# Altium PCB Tonegenerator.PcbDoc
Units mm, origin at the board's own origin, x right, y up, seen from the top; angles counter-clockwise.
Board outline 50 x 50 mm, 2 copper layers (Top Layer, Bottom Layer); 30 components, 21 nets, 124 pads, 36 vias.
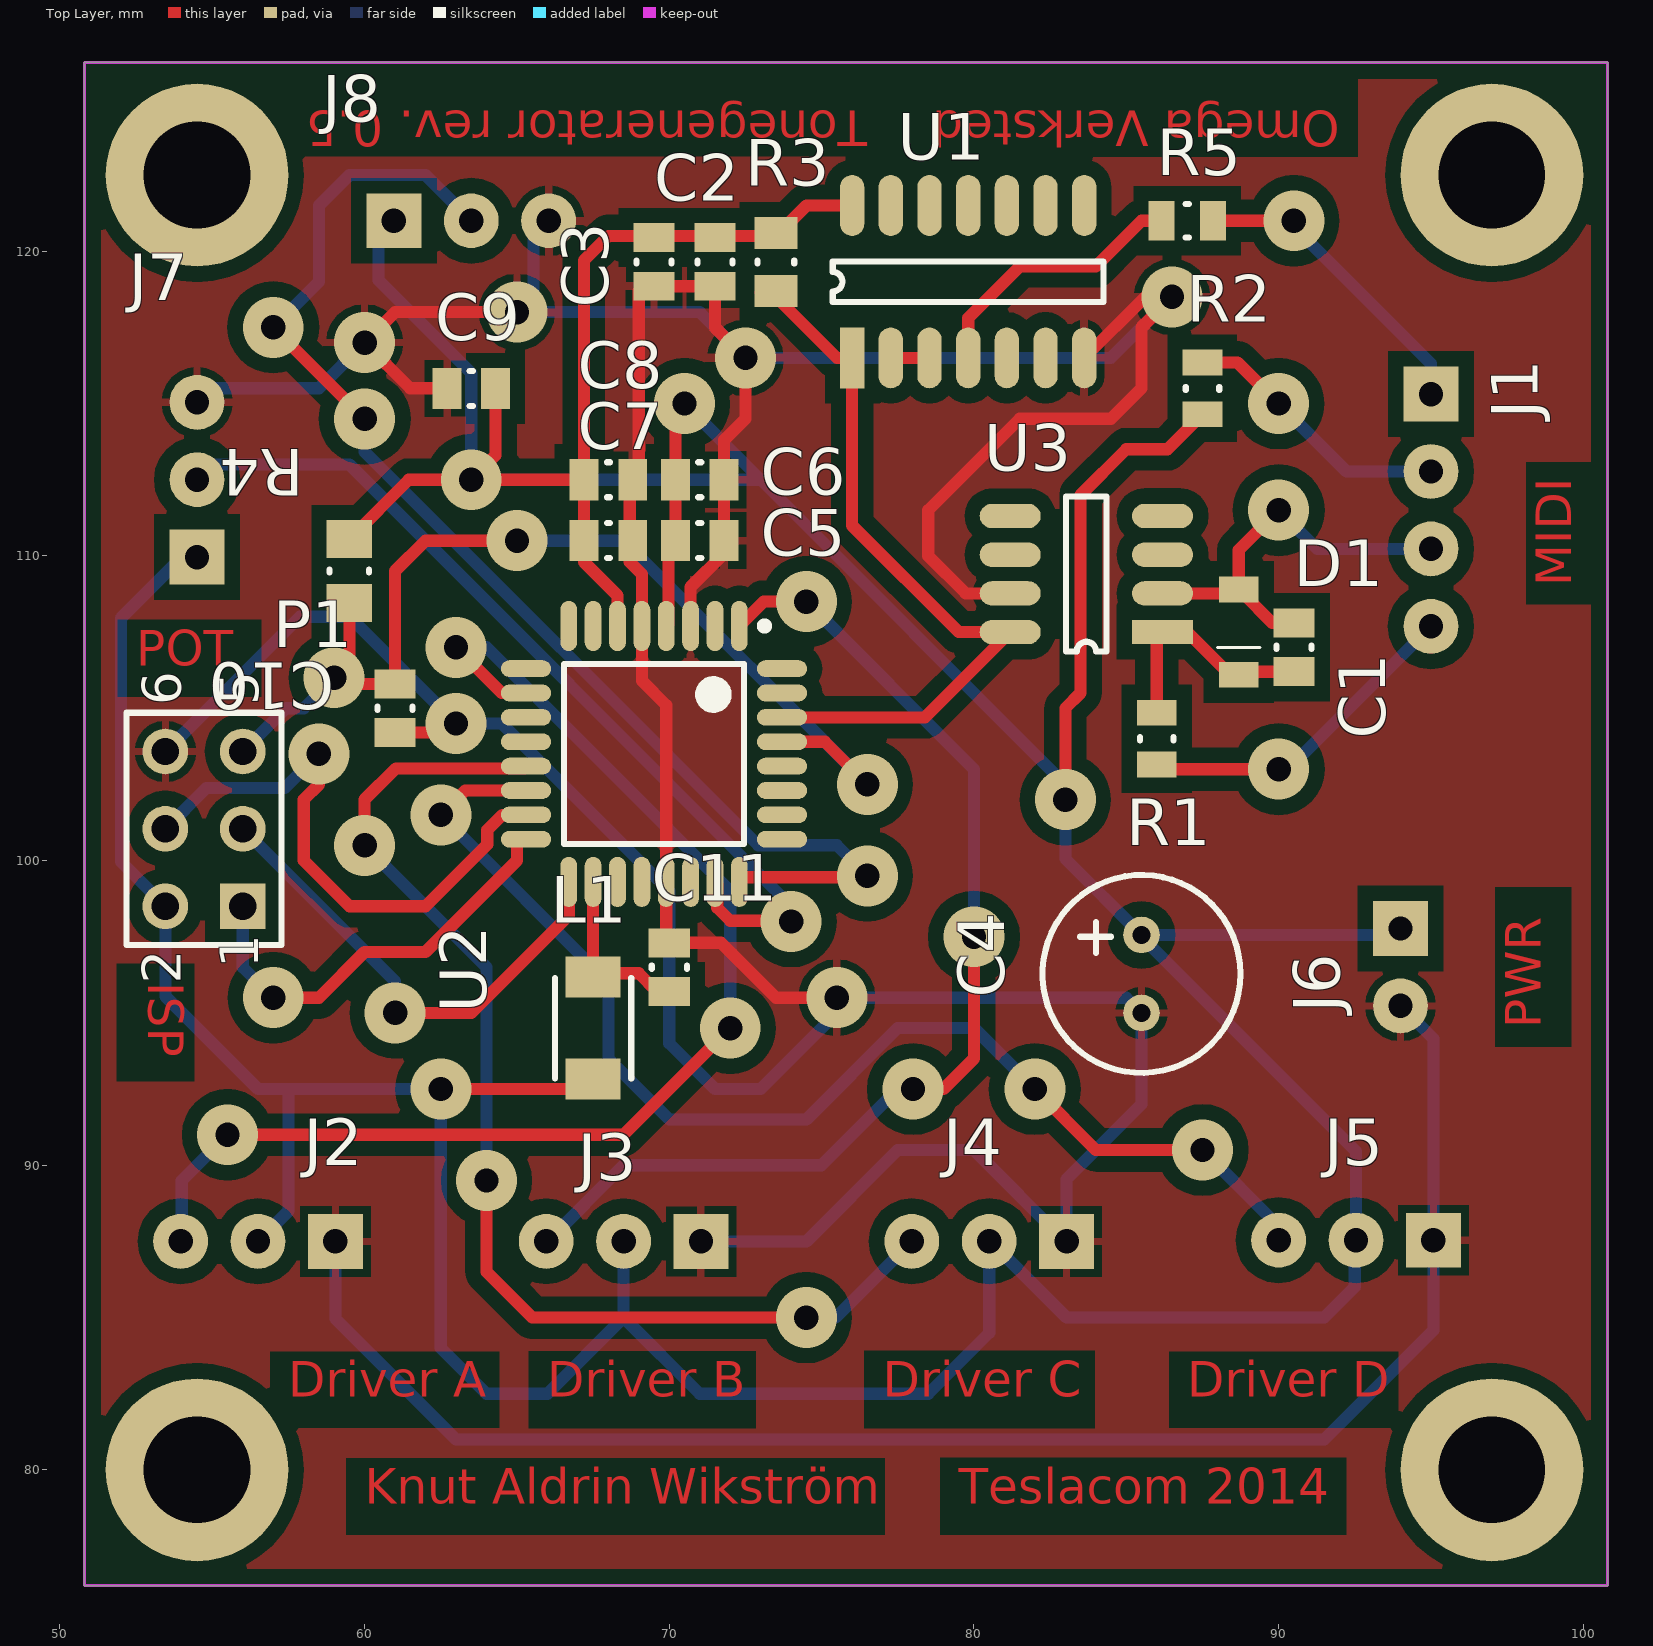
[diagram p0: Top Layer view]
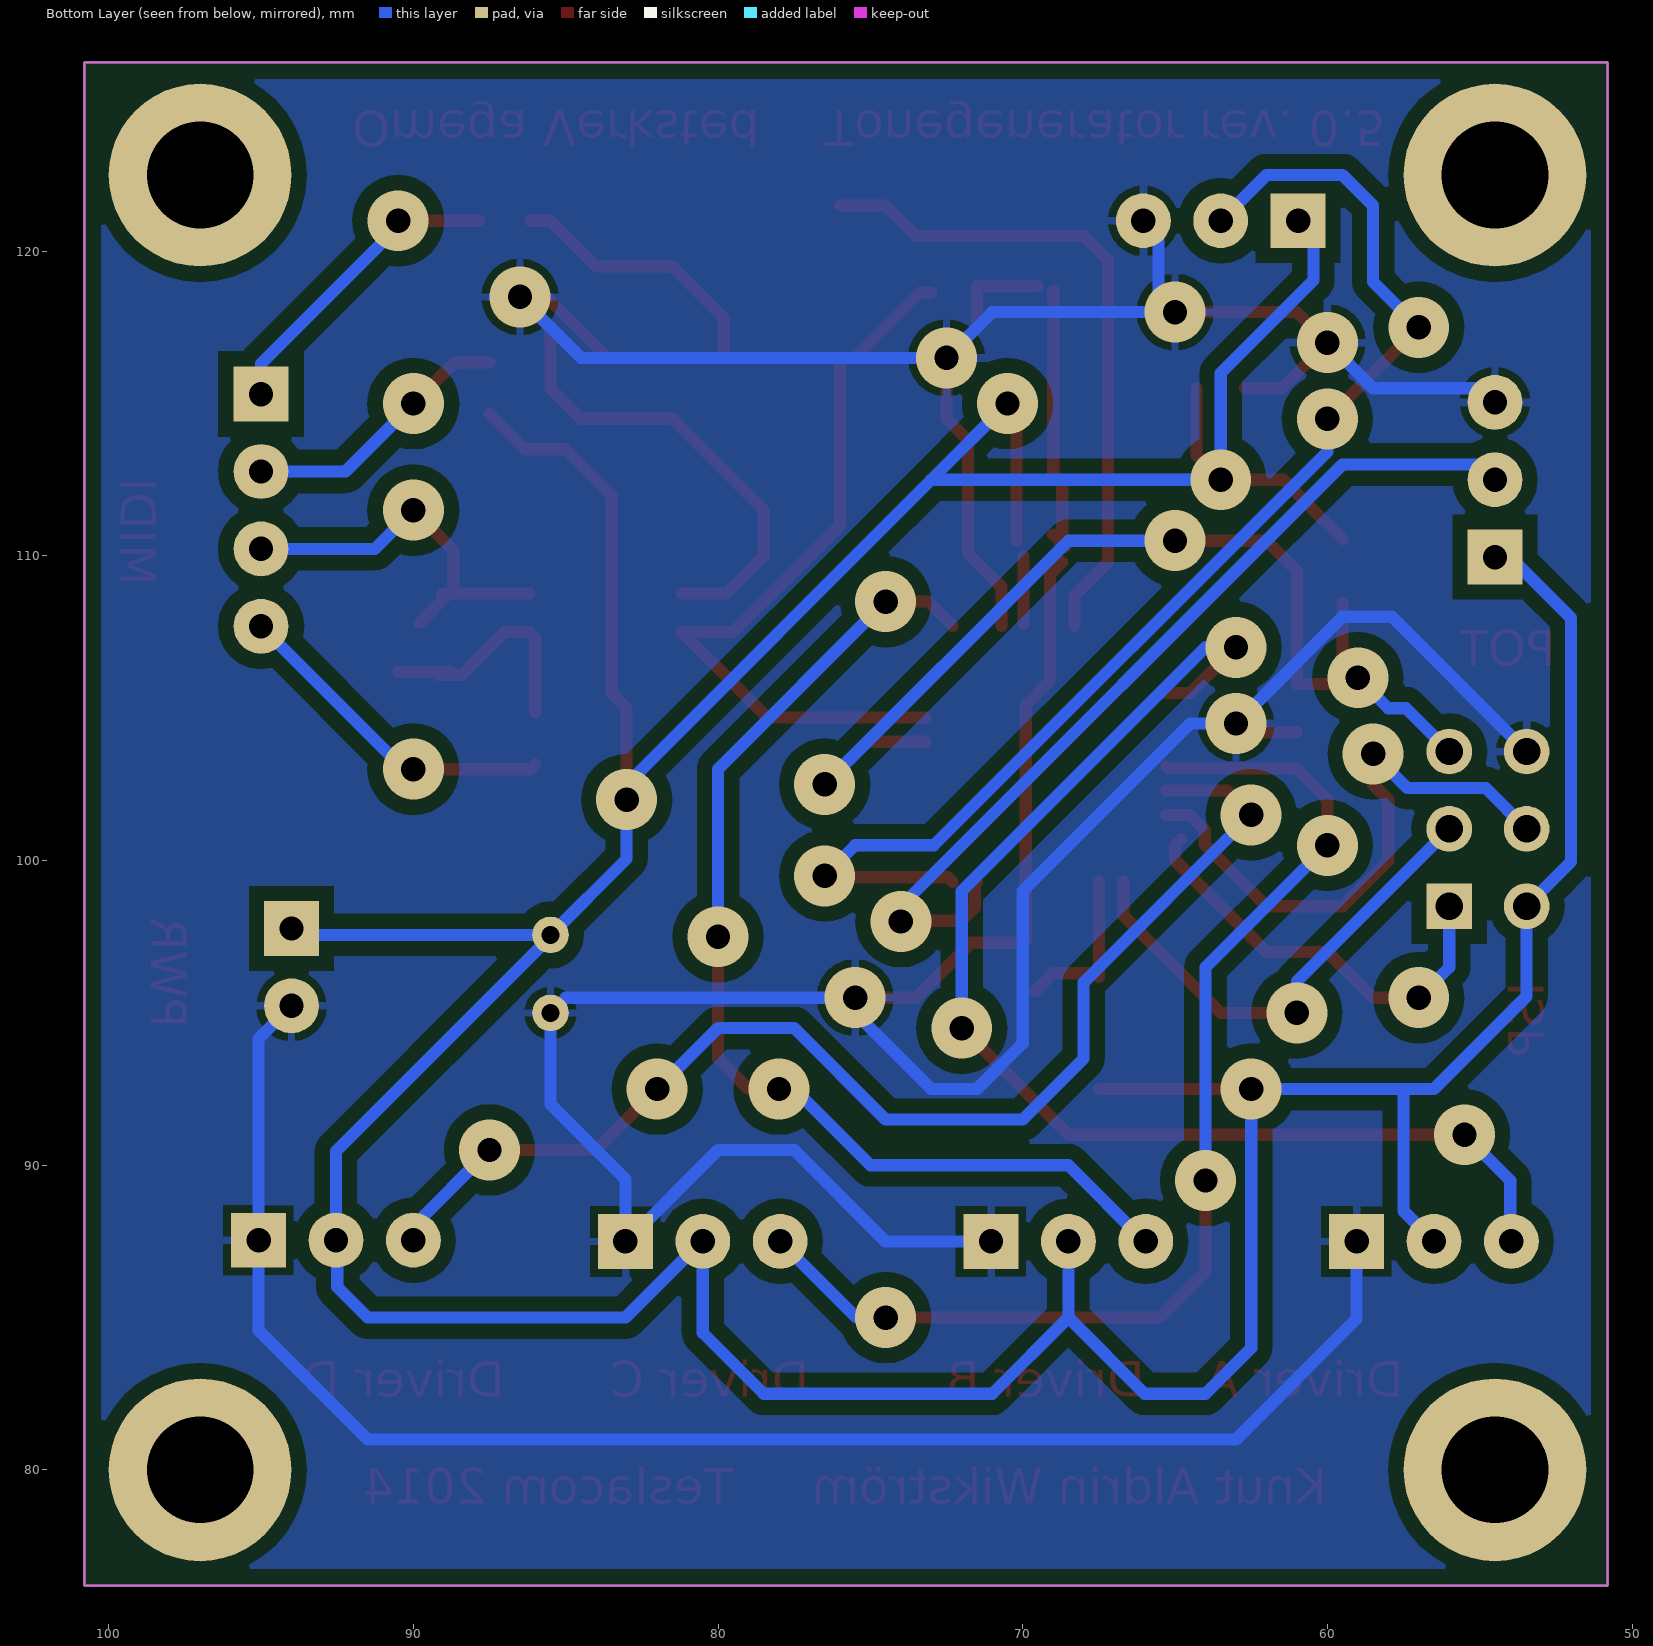
[diagram p1: Bottom Layer view, seen from below]

## Layer stack, top to bottom
Top Layer: signal copper 0.0356
Dielectric: dielectric 0.32, FR-4, Dk 4.8
Bottom Layer: signal copper 0.0356

## Board outline
50.8,76.2 100.8,76.2 100.8,126.2 50.8,126.2

## Design rules (kind name [scope] priority, off if disabled: settings)
Clearance Clearance_text [IsText] p1: gap=0.1
Clearance Clearance_poly [All vs InPolygon] p2: gap=0.5
Clearance [All] p3: gap=0.25
PolygonConnect [All] p1: connectstyle=Relief reliefconductorwidth=0.254 reliefentries=4 polygonreliefangle="90 Angle" airgapwidth=0.254
RoutingVias [All] p1: holewidth=0.8 width=2 viastyle="Through Hole" minholewidth=0.711 minwidth=1.27 maxholewidth=0.711 maxwidth=1.27
SolderMaskExpansion [All] p1: expansion=0.102
Width [All] p1: maxlimit=0.8 minlimit=0.4 preferedwidth=0.6
28 further rules are at their usual default settings.

## Components (designator, comment, footprint, x,y, rotation, side; value= is the part's Value field where it differs from the comment)
C1 "CAP 1nF 50V 0805(2012)" CAPC0805(2012)100_L 90.5,107 r270 top
C2 "CAP 100nF 50V 0805(2012)" CAPC0805(2012)100_L 71.5,119.65 r90 top
C3 "CAP 100nF 50V 0805(2012)" CAPC0805(2012)100_L 69.5,119.65 r90 top
C4 "CAP" "CAP 2.5mm" 85.5,95 r90 top
C5 "CAP 100nF 50V 0805(2012)" CAPC0805(2012)100_L 71,110.5 r180 top
C6 "CAP 100nF 50V 0805(2012)" CAPC0805(2012)100_L 71,112.5 r180 top
C7 "CAP 100nF 50V 0805(2012)" CAPC0805(2012)100_L 68,112.5 r180 top
C8 "CAP 100nF 50V 0805(2012)" CAPC0805(2012)100_L 68,110.5 r180 top
C9 "100nF" CAPC0805(2012)100_L 63.5,115.5 r0 top
C10 "100nF" CAPC0805(2012)100_L 61,105 r90 top
C11 "CAP 100nF 50V 0805(2012)" CAPC0805(2012)100_L 70,96.5 r270 top
D1 "1N4148" 1N4148 88.69,107.5 r270 top
J1 "JST 4pin" "JST 4pin" 95,111.5 r180 top
J2 "JST 3pin" "JST 3pin" 56.5,87.5 r90 top
J3 "JST 3pin" "JST 3pin" 68.5,87.5 r90 top
J4 "JST 3pin" "JST 3pin" 80.5,87.5 r90 top
J5 "JST 3pin" "JST 3pin" 92.54,87.54 r90 top
J6 "PWR" "JST 2pin" 94,96.5 r180 top
J7 "JST 3pin" "JST 3pin" 54.5,112.5 r0 top
J8 "JST 3pin" "JST 3pin" 63.5,121 r270 top
L1 "7447918" SMD-1210 67.5,94.5 r90 top
P1 "Header 3X2" HDR2X3 56,98.5 r90 top
R1 "220R 5% 0805(2012)" RESC0805(2012)_L 86,104 r270 top
R2 "220R 5% 0805(2012)" RESC0805(2012)_L 87.5,115.5 r90 top
R3 "270R 5% 0805(2012)" RESC0805(2012)_N 73.5,119.65 r90 top
R4 "10K 1% 0805(2012)" RESC0805(2012)_M 59.5,109.5 r90 top
R5 "220R 5% 0805(2012)" RESC0805(2012)_L 87,121 r0 top
U1 "74HC14" SOP14 76,116.5 r90 top
U2 "ATmega168-20AU" 32A_N 69.5,103.5 r270 top
U3 "MOCD207R2M" SOP8 86.19,107.5 r180 top

## Footprints (in the part's own frame and the unit in brackets; to place one, negate y for a bottom-side part, rotate by r counter-clockwise, add the part's x,y. Pads: shape width x height; smd on the part's side, far side on the other; paste and mask are expansions set on the pad)
1N4148 [mm]
  rect 0.85x1.3 smd: A(-1.4,0) K(1.4,0)
  silkscreen extent 0.5,-0.7 0.5,0.7
32A_N [mm] "Thin QFP, 32-Leads, Body 7x7mm, Pitch 0.8mm, IPC Medium Density"
  oval 1.65x0.55 smd: 1(-4.2,2.8) 2(-4.2,2) 3(-4.2,1.2) 4(-4.2,0.4) 5(-4.2,-0.4) 6(-4.2,-1.2) 7(-4.2,-2) 8(-4.2,-2.8) 17(4.2,-2.8) 18(4.2,-2) 19(4.2,-1.2) 20(4.2,-0.4) 21(4.2,0.4) 22(4.2,1.2) 23(4.2,2) 24(4.2,2.8)
  oval 0.55x1.65 smd: 9(-2.8,-4.2) 10(-2,-4.2) 11(-1.2,-4.2) 12(-0.4,-4.2) 13(0.4,-4.2) 14(1.2,-4.2) 15(2,-4.2) 16(2.8,-4.2) 25(2.8,4.2) 26(2,4.2) 27(1.2,4.2) 28(0.4,4.2) 29(-0.4,4.2) 30(-1.2,4.2) 31(-2,4.2) 32(-2.8,4.2)
  silkscreen extent -4.32,-2.95 2.95,3.75, body extent -3.5,-3.5 3.5,3.5, height 1.2
"CAP 2.5mm" [mm]
  round 1.2 hole 0.6: 1(0,0) 2(2.56,0)
  silkscreen extent -1.97,-3.25 4.53,3.25
CAPC0805(2012)100_L [mm] "Chip Capacitor, Body 2.0x1.2mm, Height 1.0mm, IPC High Density"
  rect 0.95x1.35 smd: 1(-0.8,0) 2(0.8,0)
  silkscreen extent -0.05,-0.58 0.05,0.58, body extent -1.1,-0.72 1.1,0.72, height 1
HDR2X3 [mm] "Connector; Header; 3x2 Position"
  rect 1.5x1.5 hole 0.9: 1(0,0)
  round 1.5 hole 0.9: 2(0,2.54) 3(2.54,0) 4(2.54,2.54) 5(5.08,0) 6(5.08,2.54)
  silkscreen extent -1.27,-1.27 6.35,3.81, body extent -1.37,-1.37 6.45,3.91
"JST 2pin" [mm]
  rect 1.8x1.8 hole 0.8: 1(0,-1.27)
  round 1.8 hole 0.8: 2(0,1.27)
  body extent -2.37,-3.7 3.38,3.7, height 7
"JST 3pin" [mm]
  rect 1.8x1.8 hole 0.8: 1(0,-2.54)
  round 1.8 hole 0.8: 2(0,0) 3(0,2.54)
  body extent -2.35,-4.95 3.4,4.95, height 7
"JST 4pin" [mm]
  rect 1.8x1.8 hole 0.8: 1(0,-3.81)
  round 1.8 hole 0.8: 2(0,-1.27) 3(0,1.27) 4(0,3.81)
  body extent -2.35,-6.2 3.4,6.2, height 7
RESC0805(2012)_L [mm] "Chip Resistor, Body 2.0x1.3mm, IPC High Density"
  rect 0.85x1.3 smd: 1(-0.85,0) 2(0.85,0)
  silkscreen extent -0.05,-0.55 0.05,0.55, body extent -1.1,-0.67 1.1,0.68, height 0.7
RESC0805(2012)_M [mm] "Chip Resistor, Body 2.0x1.3mm, IPC Low Density"
  rect 1.25x1.5 smd: 1(-1.05,0) 2(1.05,0)
  silkscreen extent -0.05,-0.65 0.05,0.65, body extent -1.1,-0.67 1.1,0.67, height 0.7
RESC0805(2012)_N [mm] "Chip Resistor, Body 2.0x1.3mm, IPC Medium Density"
  rect 1.05x1.4 smd: 1(-0.95,0) 2(0.95,0)
  silkscreen extent -0.05,-0.6 0.05,0.6, body extent -1.1,-0.67 1.1,0.68, height 0.7
SMD-1210 [mm] "Chip Inductor, 2-Leads, Body 3.2x2.5mm"
  rect 1.35x1.8 smd: 1(-1.675,0) 2(1.675,0)
  silkscreen extent -1.65,-1.25 1.65,1.25, body extent -1.6,-1.25 1.6,1.25, height 1.29
SOP8 [mm]
  rect 2x0.8 smd: 1(0,0)
  oval 2x0.8 smd: 2(0,-1.27) 3(0,-2.54) 4(0,-3.81) 5(5,-3.81) 6(5,-2.54) 7(5,-1.27) 8(5,0)
  silkscreen extent 1.84,-4.44 3.17,0.64
SOP14 [mm]
  rect 2x0.8 smd: 1(0,0)
  oval 2x0.8 smd: 2(0,-1.27) 3(0,-2.54) 4(0,-3.81) 5(0,-5.08) 6(0,-6.35) 7(0,-7.62) 8(5,-7.62) 9(5,-6.35) 10(5,-5.08) 11(5,-3.81) 12(5,-2.54) 13(5,-1.27) 14(5,0)
  silkscreen extent 1.84,-8.25 3.17,0.64

## Part data
C1: library part CMP-1036-02977-1, "CAP 1nF 50V ±5% 0805 (2012 Metric) Thickness 1mm SMD"
C2 C3 C5 C6 C7 C8 C9 C10 C11: library part CMP-1036-04418-1, "CAP 100nF 50V ±5% 0805 (2012 Metric) Thickness 1mm SMD"
J6: library part "JST 2pin"
L1: library part CMP-0221-00030-1, "SMD-Multilayer Inductor WE-MI, L = 10.00 µH"
P1: "Header, 3-Pin, Dual row"
R1 R2 R5: library part CMP-1013-00058-1, "220R 0.125W 5% 0805 (2012 Metric)  SMD"
R3: library part CMP-1013-00060-1, "270R 0.125W 5% 0805 (2012 Metric)  SMD"
R4: library part CMP-1013-00623-1, "10K 0.125W 1% 0805 (2012 Metric)  SMD"
U2: library part CMP-0095-00552-1, "8-bit AVR Microcontroller, 2.7-5.5V, 20MHz, 16KB Flash, 512 Bytes EEPROM, 1KB SRAM, 32-pin TQFP, Industrial Grade (-40°C to 85°C)"

## Free pads (board coordinates)
  round 6 hole 3.5: 0(54.5,80) 1(97,80) 2(97,122.5) 3(54.5,122.5)

## Via types
v1: diameter 2, hole 0.8, Top Layer to Bottom Layer, 36 vias

## Nets (pads, with @x,y where several pads share a name; then routed paths per layer and width w, separated by ;. In a path a pad name is that pad's centre, name@x,y a point inside that pad or via, vN(x,y) a via of type N, cw(c..) or ccw(c..) an arc to the next point about the centre after c; other vN are vias at no path point)
+5V: C2.2 C3.2 C4.2 C5.2 C6.2 C7.2 C8.2 C9.2 J2.2 J3.2 J4.2 J5.2 J6.1 J7.1 J8.1 L1.1 P1.2 R2.1 R3.2 R4.2 U1.14 U2.4 U2.6 | length 207.4
  Top Layer w0.4: R4.2 61.45,112.5 v1(63.5,112.5) ; v1@63,92.5 L1.1@67.5,92.5 ; C9.2 64.3,113.3 v1(63.5,112.5) ; U2.6 68.3,108.7 67.2,109.8 C8.2 C7.2 ; U2.4@69.975,107.775 C5.2@69.975,110 ; C5.2 C6.2 70.2,114.7 v1(70.5,115) ; U1.14 74.5,121.5 73.5,120.5 68,120.5 67.2,119.7 C7.2 ; v1(83,102) 83,105 83.5,105.5 83.5,112 85,113.5 86.35,113.5 R2.1 ; J5.2@92.5,87.54 92.5,87.58 J5.2 ; v1(63.5,112.5) C7.2
  Bottom Layer w0.4: J7.1@54.5,110.46 52,107.96 52,99.96 P1.2 53.46,95.54 56.5,92.5 57.5,92.5 ; J2.2 57.5,88.5 57.5,92.5 ; J8.1@60.46,121 60.46,119.04 63.5,116 v1(63.5,112.5) 73,112.5 ; J3.2 68.5,85 ; v1(70.5,115) 73,112.5 ; J4.2 80.5,84.5 78.5,82.5 71,82.5 68.5,85 ; J4.2@80.54,87.5 83.04,85 91.5,85 92.5,86 92.5,87.5 J5.2 92.54,90.46 C4.2@85.5,97.5 ; v1(83,102) 83,100.06 C4.2 93.79,97.56 J6.1 ; v1@83,102.5 73,112.5 ; 57.5,92.5 59,92.5 62,92.5 62.25,92.75 v1(62.5,92.5) 62.5,83.998 63.998,82.5 66,82.5 68.5,85
DRIVER1: J2.3 U2.10 | length 41.8
  Top Layer w0.4: v1(55.5,91) 68.5,91 v1(72,94.5) ; v1(63,107) 64.5,105.5 U2.10
  Bottom Layer w0.4: J2.3@54,87.54 54,89.5 v1(55.5,91) ; v1(63,107) 64,107 72,99 v1(72,94.5)
DRIVER2: J3.3 U2.1 | length 37.2
  Top Layer w0.4: U2.1 73.1,108.5 v1(74.5,108.5) ; v1@78,93 78.5,92.5 79,92.5 80,93.5 v1(80,97.5)
  Bottom Layer w0.4: J3.3@66,87.5 68.5,90 75,90 v1@78,93 ; v1(74.5,108.5) 80,103 v1@80,97
  other v1: 78,92.5
DRIVER3: J4.3 U2.13 | length 38.7
  Top Layer w0.4: v1(60,100.5) 60,102 61.025,103.025 65.225,103.025 U2.13 ; v1(64,89.5) 64,86.5 65.5,85 v1(74.5,85)
  Bottom Layer w0.4: v1@60.25,100.75 60.25,100.25 64,96.5 v1(64,89.5) ; v1(74.5,85) 75.46,85 J4.3
DRIVER4: J5.3 U2.14 | length 40.6
  Top Layer w0.4: v1(62.5,101.5) 63.3,102.3 U2.14 ; v1(82,92.5) 84,90.5 v1(87.5,90.5)
  Bottom Layer w0.4: v1(62.5,101.5) 68,96 68,93.5 70,91.5 74.5,91.5 77.5,94.5 80,94.5 v1(82,92.5) ; v1(87.5,90.5) 90,88 J5.3
GND: C2.1 C3.1 C4.1 C5.1 C6.1 C7.1 C8.1 C9.1 C10.1 C11.1 J2.1 J3.1 J4.1 J5.1 J6.2 J7.3 J8.3 P1.6 U1.7 U2.3 U2.5 U2.21 U3.7 | length 225.7
  Top Layer w0.4: C10.1 v1@62.7,104.2 ; C9.1 61.5,115.5 v1(60,117) 61,118 v1(65,118) ; C8.1@68.6,110.3 C8.1@68.7,110.4 ; 68.7,109.8 69.1,109.4 U2.5 69.1,105.9 69.9,105.1 U2.21 C11.1@69.9,97.4 ; C7.1@68.7,112.4 C8.1@68.7,110.4 ; C8.1@69,110.7 C8.1 C8.1@68.7,110.4 ; C7.1@69,112.7 C3.1@69,118.7 ; C3.1 C2.1 71.5,117.5 v1(72.5,116.5) 72.5,114.5 71.8,113.8 C6.1 C5.1 71.8,110.075 70.7,108.975 U2.3 ; C11.1 71.7,97.3 73.5,95.5 v1(75.5,95.5) ; U3.7 79.73,108.77 78.5,110 78.5,111.5 81.5,114.5 84.5,114.5 85.5,115.5 85.5,117.5 v1(86.5,118.5) 85.62,118.5 U1.7
  Bottom Layer w0.4: P1.6 57.88,108 59.5,108 v1(63,104.5) 64.5,104.5 70,99 70,94 71.5,92.5 73,92.5 76,95.5 85,95.5 C4.1 85.5,92 83.04,89.54 J4.1 ; J7.3@54.5,115.54 54.54,115.5 58.5,115.5 v1(60,117) ; J2.1 59.04,84.96 63,81 91.5,81 95.08,84.58 J5.1 95.08,94.15 J6.2 ; J8.3@65.54,121 65.54,118.54 v1(65,118) 71,118 v1(72.5,116.5) 84.5,116.5 v1(86.5,118.5) ; J3.1 74.5,87.5 77.5,90.5 80,90.5 J4.1@83,87.5
NetC1_1: C1.1 D1.A J1.3 U3.2 | length 13.3
  Top Layer w0.4: U3.2 D1.A@88.56,108.77 ; D1.A@89.06,108.77 D1.A@88.82,108.77 ; 89.79,107.8 D1.A@88.82,108.77 ; v1(90,111.5) 88.69,110.19 D1.A ; D1.A@88.56,108.77 D1.A ; D1.A@88.56,108.77 D1.A@88.82,108.77 ; D1.A D1.A@88.82,108.77
  Bottom Layer w0.4: v1(90,111.5) 91.27,110.23 J1.3
NetC1_2: C1.2 D1.K R1.1 U3.1 | length 7.7
  Top Layer w0.4: R1.1 U3.1@86,107.31 ; U3.1 87,107.5 88.4,106.1 D1.K@89.19,106.1 ; D1.K@88.79,106.2 C1.2
NetC10_2: C10.2 P1.5 R4.1 U2.29 | length 36.6
  Top Layer w0.4: v1@58.775,105.775 v1@59,105.55 ; R4.1 59.5,106.5 v1(59,106) 59.2,105.8 C10.2 61,109.5 62,110.5 v1(65,110.5) ; U2.29@73.2,103.9 75.1,103.9 v1(76.5,102.5) v1@76.75,102.25
  Bottom Layer w0.4: P1.5 57.42,105 58,105 v1(59,106) ; v1(65,110.5) 68.5,110.5 v1@76.75,102.25
NetC11_2: C11.2 L1.2 U2.18 | length 5.3
  Top Layer w0.4: L1.2 U2.18 ; L1.2@67.625,96.3 69,96.3 C11.2@69.6,95.7
NetJ1_1: J1.1 R5.2 | length 9.8
  Top Layer w0.4: R5.2 v1(90.5,121)
  Bottom Layer w0.4: v1@90.5,120.81 95,116.31 J1.1@95,115.5
NetJ1_2: J1.2 R2.2 | length 9
  Top Layer w0.4: R2.2 88.65,116.35 v1(90,115)
  Bottom Layer w0.4: v1(90,115) 92.23,112.77 J1.2
NetJ1_4: J1.4 R1.2 | length 11.5
  Top Layer w0.4: R1.2 86.15,103 v1(90,103) ; J1.4@95,107 J1.4@95,107.5
  Bottom Layer w0.4: v1(90,103) 90.31,103 J1.4
NetJ7_2: J7.2 U2.23 | length 29.5
  Top Layer w0.4: U2.23 71.575,99.225 71.575,98.45 72,98.025 73.975,98.025 v1(74,98)
  Bottom Layer w0.4: J7.2@54.5,113 59.5,113 74,98.5 v1(74,98)
NetJ8_2: J8.2 U2.24 | length 42.5
  Top Layer w0.4: v1@57,118 v1(57,117.5) v1(60,114.5) ; U2.24 72.45,99.45 v1@76.45,99.45
  Bottom Layer w0.4: v1@57,118 57.5,118 58.5,119 58.5,121.5 59.5,122.5 62,122.5 63,121.5 J8.2@63,121 ; v1(60,114.5) 60,113.419 72.919,100.5 75.5,100.5 v1(76.5,99.5)
NetP1_1: P1.1 U2.16 | length 14.6
  Top Layer w0.4: P1.1@56,98 P1.1 ; v1(57,95.5) 58.5,95.5 60,97 62,97 65,100 65,100.5 U2.16@64.8,100.7
  Bottom Layer w0.4: P1.1 56,96.5 v1(57,95.5)
NetP1_3: P1.3 U2.17 | length 16.2
  Top Layer w0.4: v1(61,95) 63.5,95 66.7,98.2 U2.17
  Bottom Layer w0.4: P1.3 61,96.04 v1(61,95)
NetP1_4: P1.4 U2.15 | length 19.2
  Top Layer w0.4: v1@58.5,103.499 58.5,102.5 58,102 58,100 59.5,98.5 62,98.5 64.025,100.525 64.025,101 64.525,101.5 U2.15
  Bottom Layer w0.4: P1.4 54.8,102.38 57.38,102.38 v1(58.5,103.5)
NetR5_1: R5.1 U1.4 | length 9
  Top Layer w0.4: U1.4 79.81,117.81 81.5,119.5 84,119.5 85.5,121 R5.1
NetU1_2: U1.2 U1.3 | length 1.3
  Top Layer w0.4: U1.2 U1.3
"TO UART": R3.1 U1.1 U2.30 U3.8 | length 25.2
  Top Layer w0.4: R3.1@73,118.65 73.35,118.65 75.5,116.5 U1.1 76,111 79.5,107.5 U3.8 78.39,104.7 U2.30@73.2,104.7
pads on no net: U1.5 U1.6 U1.8 U1.9 U1.10 U1.11 U1.12 U1.13 U2.2 U2.7 U2.8 U2.9 U2.11 U2.12 U2.19 U2.20 U2.22 U2.25 U2.26 U2.27 U2.28 U2.31 U2.32 U3.3 U3.4 U3.5 U3.6

## Polygon pours and split planes (outlines as drawn)
GND on Top Layer "Bottom Layer-No Net" (solid, remove dead copper, pour order 4): 50.8,126.2 100.8,126.2 100.8,76.2 50.8,76.2 50.8,126.2
GND on Bottom Layer "Bottom Layer-No Net 1" (solid, pour order 3): 50.8,126.2 100.8,126.2 100.8,76.2 50.8,76.2 50.8,126.2

## Keep-outs
Keep-Out Layer:
  the board outline again, w0.1

## Other copper
Top Layer:
  text "Tonegenerator rev. 0.5" at 76.5,125 h2 r180
  text "Omega Verksted" at 92,125 h2 r180
  text "MIDI" at 100,109 h2 r90
  text "POT" at 52.5,106 h2
  text "ISP" at 52.5,96 h2 r270
  text "PWR" at 99,94.5 h2 r90
  text "Driver A" at 57.5,82 h2
  text "Driver B" at 66,82 h2
  text "Driver C" at 77,82 h2
  text "Driver D" at 87,82 h2
  text "Knut Aldrin Wikström" at 60,78.5 h2
  text "Teslacom 2014" at 79.5,78.5 h2

## Dimensions
50.8,76.2 to 50.8,126.2 on Mechanical 1
50.8,76.2 to 100.8,76.2 on Mechanical 1

## Text inside footprints (layer, text, board x,y; h text height)
P1: Top Overlay "6" at 53.968,105.104 h1.27 r90; Top Overlay "5" at 56.508,105.104 h1.27 r90; Top Overlay "2" at 53.968,95.96 h1.27 r90; Top Overlay "1" at 56.508,96.468 h1.27 r90